# Allegro board bp2_02_ctrl.brd
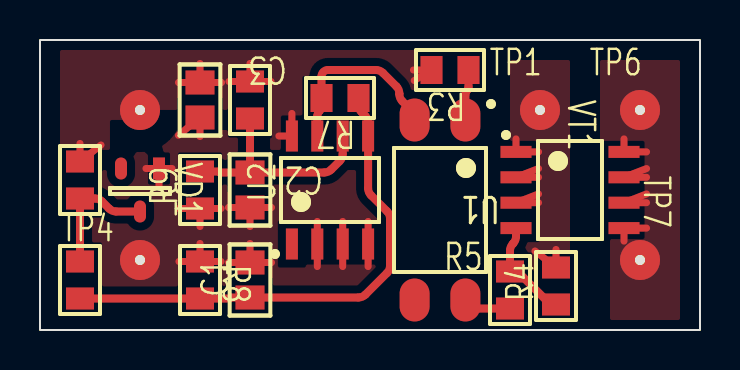
[diagram p0: board, top side]
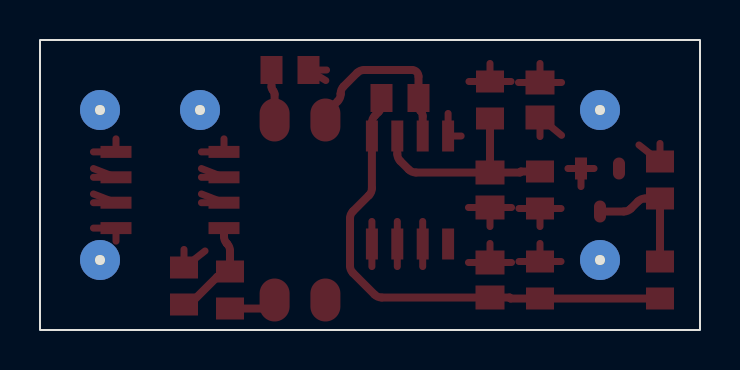
[diagram p1: board, bottom side, seen from below]

Outline 33 x 14.5 mm; copper layers: TOP, BOTTOM. Coordinates in mm from the lower left corner of the outline.
Outline path: rectangle 0,0 33,14.5

## Placement (name value [footprint] x y rotation side)
C1  0.01uF  [CAPC2012X130N]  10.5 2.5 90 top
C2  0.01uF  [CAPC2012X130N]  10.5 7 270 top
C3  0.01uF  [CAPC2012X130N]  8 11.5 270 top
R1  5.1k  [RESC2012X40N]  2 7.5 90 top
R2  10k  [RESC2012X40N]  10.5 11.5 90 top
R3  1k  [RESC2012X40N]  20.5 13 180 top
R4  10k  [RESC2012X40N]  25.8 2.2 90 top
R5  100  [RESC2012X40N]  23.5 2 90 top
R6  3.6k  [RESC2012X40N]  2 2.5 90 top
R7  100k  [RESC2012X40N]  15 11.6 180 top
R8  10k  [RESC2012X40N]  8 2.5 270 top
R9  10k  [RESC2012X40N]  8 7 90 top
TP1  +5Vi  [KP_1_8]  25 11 0 top
TP3  +24V  [KP_1_8]  5 11 0 top
TP4  -24V  [KP_1_8]  5 3.5 0 top
TP6  +5V  [KP_1_8]  30 11 0 top
TP7  +5V  [KP_1_8]  30 3.5 0 top
U1  HCPL-181-00DE  [SOIC254P1000X370-4N]  20 6 270 top
U2  LM293D  [SOIC127P600X175-8N]  14.5 7 90 top
VD1  BZX84C15  [SOT95P230X110-3N]  5 7 270 top
VT1  IRF7410  [SOIC127P600X175-8N]  26.5 7 0 top

## Library data of the parts
C1-C3 = CAPACITOR
R1 R5 R6 = R_0.125W
R2-R4 R7-R9 = RESISTOR
TP1 TP3 TP4 TP6 TP7 = TP
U1 = HCPL181_v1_0
U2 = LMC6762
VD1 = STAB_3
VT1 = IRF7410_v2

## Footprints (pads in the part's own frame, mm; a bottom-side part is the same pattern mirrored in y, then rotated)
CAPC2012X130N
  rect 1.2x1.45 smd: 1(-0.875,0) 2(0.875,0)
KP_1_8
  round 2 hole 0.5: 1(0,0)
RESC2012X40N
  rect 1.1x1.4 smd: 1(-0.925,0) 2(0.925,0)
SOIC127P600X175-8N
  rect 1.55x0.6 smd: 1(-2.7,1.905) 2(-2.7,0.635) 3(-2.7,-0.635) 4(-2.7,-1.905) 5(2.7,-1.905) 6(2.7,-0.635) 7(2.7,0.635) 8(2.7,1.905)
SOIC254P1000X370-4N
  oval 2.15x1.5 smd: 1(-4.5,1.27) 2(-4.5,-1.27) 3(4.5,-1.27) 4(4.5,1.27)
SOT95P230X110-3N
  rect 1.1x0.6 smd: 1(-1.075,0.95)
  oval 1.1x0.6 smd: 2(-1.075,-0.95) 3(1.075,0)

## Nets
+24V: C3.1 R1.2 R2.2 R3.2 TP3.1 U2.8(V+)
-24V: C1.2 C2.2 C3.2 R8.1 R9.1 TP4.1 U2.2(-IN) U2.3(+IN) U2.4(V-) VD1.1(ANODE)
CP+: C1.1 R6.1 R7.1 R8.2 U2.5(+IN)
CP-: C2.1 R2.1 R9.2 U2.6(-IN)
N133972: R1.1 R6.2 VD1.3(CATHODE)
N134912: R7.2 U1.2(CATHODE) U2.7(OUT)
N135243: R3.1 U1.1(ANODE)
N135692: R4.1 R5.2 VT1.4(G)
N135796: R5.1 U1.4(COLLECTOR)
N135840: U1.3(EMITTER)
N136143: TP6.1 TP7.1 VT1.5(D5) VT1.6(D6) VT1.7(D7) VT1.8(D8)
N136549: R4.2 TP1.1 VT1.1(S1) VT1.2(S2) VT1.3(S3)

Pads without a net: U2 1; VD1 2

## Routing (per net, layer and track width the routed paths; a pad name or vN(x,y) marks a point on that pad's centre or on a via; arc(x,y) is an arc through that point)
+24V: length 12
  TOP w0.35: 9.45,12.43 R2.2 ; R2.2 10.5,13.33 ; R2.2 11.55,12.43 ; 3.05,9.25 R1.2 2,9.33 ; 18.71,12.47 R3.2 18.67,13 ; C3.1 8,13.33 ; C3.1 6.92,12.38 ; C3.1 9.08,12.38 ; 12.59,10.83 U2.8 11.94,9.7
-24V: length 23.5
  TOP w0.35: 10.5,5.17 C2.2 ; C2.2 9.42,6.12 ; C2.2 11.58,6.12 ; R9.1 9.05,6.08 ; R9.1 8,5.17 ; R9.1 6.95,6.08 ; R8.1 9.05,3.42 ; R8.1 6.95,3.42 ; R8.1 8,4.33 ; 9.42,3.38 C1.2 ; C1.2 10.5,4.33 ; C1.2 11.58,3.38 ; 6.92,9.73 C3.2 8,9.67 ; 13.87,5.43 U2.2 13.87,3.17 ; 15.13,5.43 U2.3 15.13,3.17 ; 16.41,3.17 U2.4 16.41,5.43 ; VD1.1 6.6,8.07 ; VD1.1 5.95,7.17 ; VD1.1 5.3,8.07
CP+: length 25.2
  TOP w0.4: R6.1 R8.2 9.47,1.57 9.52,1.62 C1.1 15.92,1.62 arc(16.11,1.66) 16.27,1.77 17.35,2.85 arc(17.46,3.02) 17.5,3.21 17.5,5.58 arc(17.46,5.77) 17.35,5.93 16.55,6.74 arc(16.44,6.9) 16.41,7.09 U2.5 16.41,10.36 arc(16.37,10.55) 16.26,10.71 16.07,10.9 arc(15.96,11.06) 15.93,11.26 R7.1
CP-: length 11.2
  TOP w0.4: 10.5,10.57 C2.1 ; C2.1 9,7.88 8.95,7.92 R9.2 ; C2.1 14.21,7.88 arc(14.4,7.91) 14.56,8.02 14.99,8.45 arc(15.1,8.61) 15.13,8.8 U2.6
N133972: length 6.4
  TOP w0.4: VD1.3 3.81,5.92 arc(3.62,5.96) 3.46,6.07 3.1,6.43 arc(2.94,6.54) 2.75,6.58 R1.1 R6.2
N134912: length 9.3
  TOP w0.4: U1.2 18.73,10.62 arc(18.69,10.81) 18.58,10.97 18.11,11.44 arc(18,11.6) 17.97,11.79 17.97,11.83 arc(17.93,12.02) 17.82,12.18 17.15,12.85 arc(16.98,12.96) 16.79,13 14.4,13 arc(14.17,12.9) 14.07,12.68 R7.2 14.07,11.2 arc(14.05,11.06) 13.97,10.94 arc(13.89,10.83) 13.87,10.69 U2.7
N135243: length 2.5
  TOP w0.4: R3.1 21.43,12.16 arc(21.4,12.06) 21.35,11.97 arc(21.29,11.88) 21.27,11.78 U1.1
N135692: length 5.2
  TOP w0.4: VT1.4 23.8,4.67 arc(23.76,4.48) 23.65,4.32 23.65,4.31 arc(23.54,4.15) 23.5,3.96 R5.2 23.51,2.92 arc(23.65,2.82) 23.82,2.79 arc(24,2.75) 24.14,2.65 25.38,1.42 arc(25.54,1.31) 25.73,1.28 25.8,1.28
N135796: length 2.4
  TOP w0.4: U1.4 21.55,1.22 arc(21.71,1.11) 21.9,1.07 R5.1
N136143: length 8.2
  TOP w0.35: 30.33,6.37 VT1.6 30.33,6.8 ; 30.33,7.63 VT1.7 30.33,8.07 ; 30.33,8.9 29.2,8.9 29.2,9.56 ; 29.2,4.44 VT1.5 30.33,5.09
N136549: length 8.7
  TOP w0.35: 24.75,3.95 R4.2 25.8,4.03 ; 24.93,6.8 VT1.3 24.93,6.37 ; 24.93,7.63 VT1.2 24.93,8.07 ; 23.8,9.56 23.8,8.9 24.93,8.9

## Copper pours and planes (outline as drawn; the poured copper is in the pictures)
+24V on TOP: 1,8.5 4,8.5 4,10 6,10 6,10.5 11,10.5 11,8.5 17,8.5 17,12 22.5,12 22.5,14 1,14
-24V on TOP: 1,8 1,1.5 17,1.5 17,8 10.5,8 10.5,10 6.5,10 6.5,9.5 4.5,9.5 4.5,8
N136143 on TOP: 28.5,0.5 32,0.5 32,13.5 28,13.5 28,4.5 28.5,4.5
N136549 on TOP: 26.5,13.5 26.5,0.5 23.5,0.5 23.5,13.5
